# Altium PCB DE-160516.PcbDoc
Units mm, origin at the board's own origin, x right, y up, seen from the top; angles counter-clockwise.
Board outline 97 x 97 mm, 2 copper layers (Top Layer, Bottom Layer); 60 components, 64 nets, 225 pads, 26 vias.
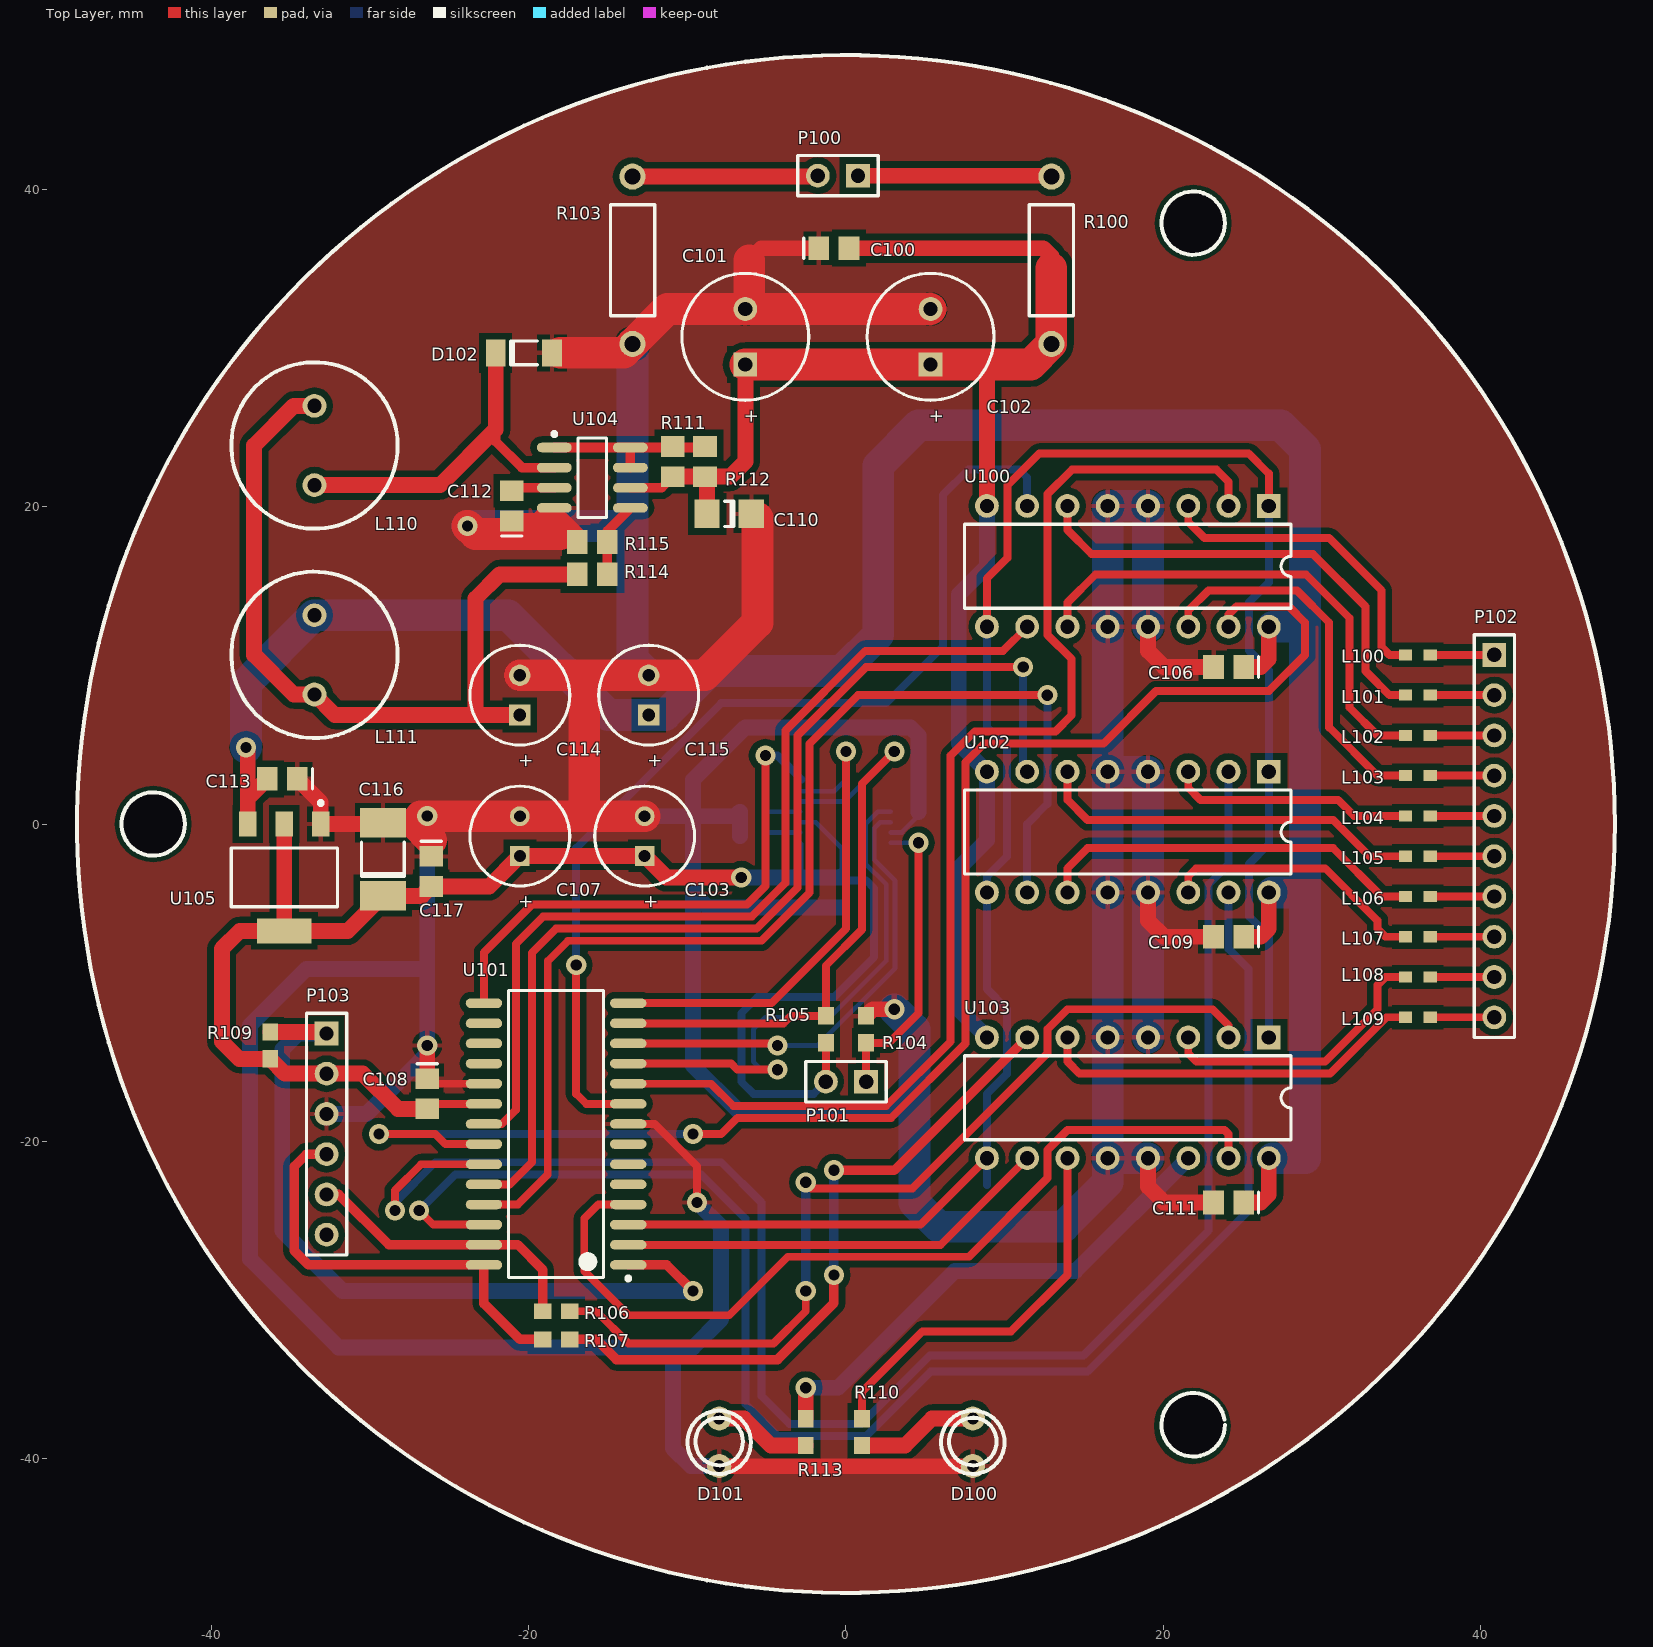
[diagram p0: Top Layer view]
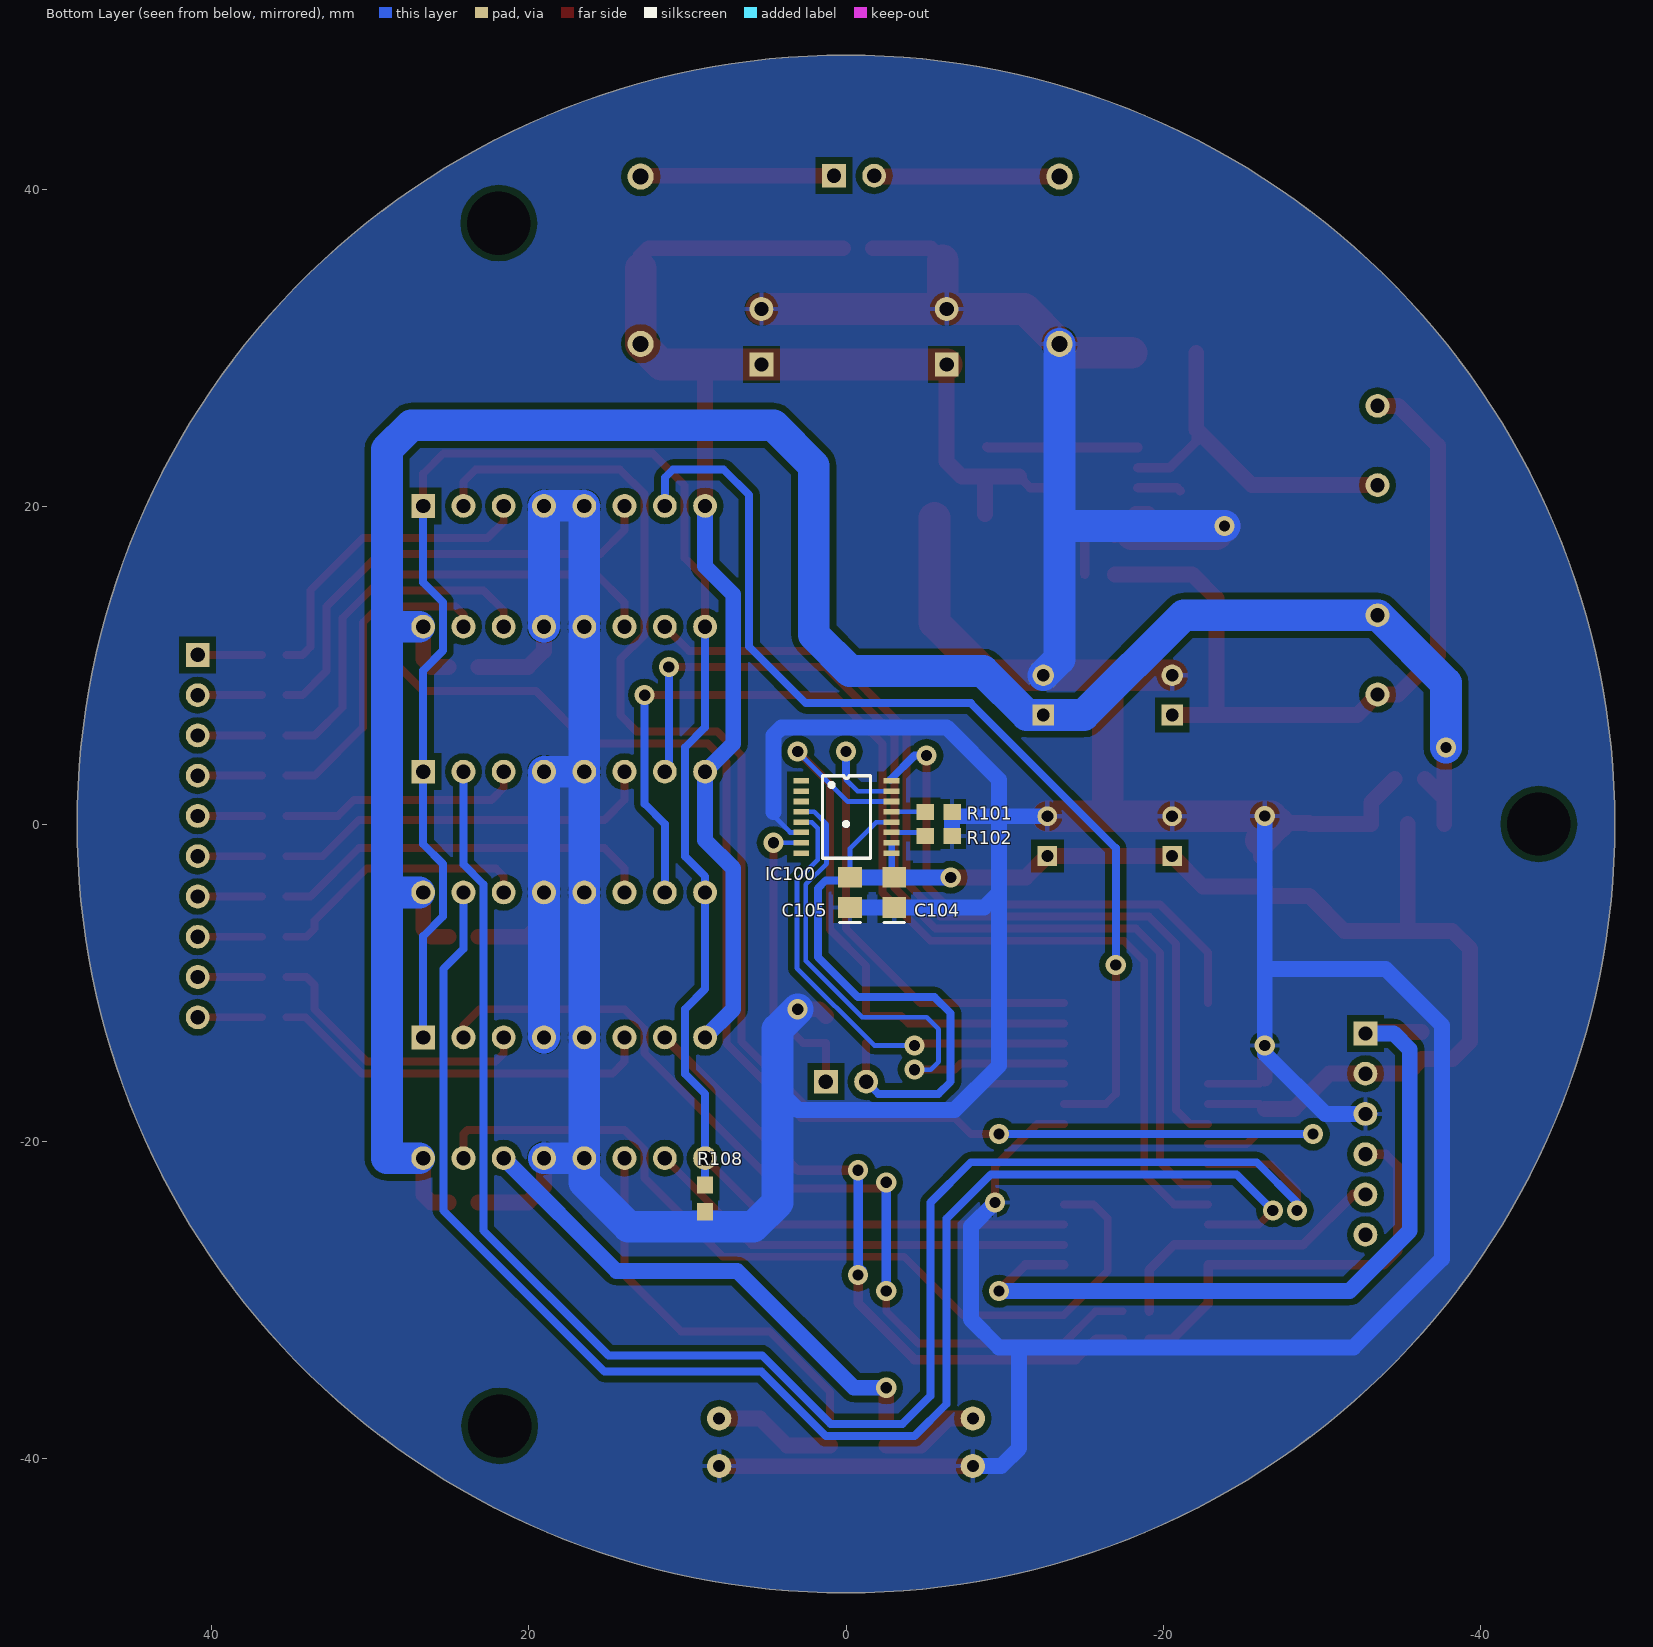
[diagram p1: Bottom Layer view, seen from below]

## Layer stack, top to bottom
Top Solder: solder mask 0.0102, Solder Resist, Dk 3.5
Top Layer: signal copper 0.0356
Dielectric 1: dielectric 0.32, FR-4, Dk 4.8
Bottom Layer: signal copper 0.0356
Bottom Solder: solder mask 0.0102, Solder Resist, Dk 3.5

## Board outline
-48.5,0 ccw(c0,0) 0,-48.5 ccw(c0,0) 48.5,0 ccw(c0,0) 0,48.5 ccw(c0,0)

## Design rules (kind name [scope] priority, off if disabled: settings)
Clearance [All] p1: gap=0.254 except(0.4: Arc-Poly Track-Poly SMDPad-Poly THPad-Poly Via-Poly Fill-Poly Poly-Poly)
PlaneClearance [All] p1: clearance=1
PlaneConnect [All] p1: planeconnectstyle=Relief reliefexpansion=0.508 reliefentries=4 reliefconductorwidth=0.4 reliefairgap=3
PolygonConnect [All] p1: connectstyle=Relief reliefconductorwidth=0.3 reliefentries=4 polygonreliefangle="90 Angle" airgapwidth=0.3
RoutingVias [All] p1: holewidth=0.711 width=1.27 viastyle="Through Hole" minholewidth=0.711 minwidth=1.27 maxholewidth=0.711 maxwidth=1.27
SolderMaskExpansion [All] p1: expansion=0.102
Width [All] p1: maxlimit=5 minlimit=0.254 preferedwidth=1
28 further rules are at their usual default settings.

## Components (designator, comment, footprint, x,y, rotation, side; value= is the part's Value field where it differs from the comment)
C100 "" 0805 -0.762,36.322 r0 top
C101 "220uF" E -6.35,30.734 r90 top
C102 "220uF" E 5.334,30.734 r90 top
C103 "10uF" C -12.7,-0.762 r90 top
C104 "" 0805 -3.048,-4.318 r90 bottom
C105 "" 0805 -0.254,-4.318 r90 bottom
C106 "" 0805 24.13,9.906 r180 top
C107 "10uF" C -20.574,-0.762 r90 top
C108 "" 0805 -26.416,-17.018 r270 top
C109 "" 0805 24.13,-7.112 r180 top
C110 "" 1206 -7.366,19.558 r180 top
C111 "" 0805 24.13,-23.876 r180 top
C112 "" 0805 -21.082,20.066 r90 top
C113 "" 0805 -35.56,2.849 r180 top
C114 "470uF" CAPPR2.5-6.3X11 -20.574,8.128 r90 top
C115 "470uF" CAPPR2.5-6.3X11 -12.446,8.128 r90 top
C116 "10uF" 49BC-C -29.21,-2.231 r90 top
C117 "" 0805 -26.162,-2.993 r270 top
D100 "STATUS" "LED 3mm" 8,-39 r90 top
D101 "ZERO POS" "LED 3mm" -8,-39 r90 top
D102 "BAV102" SOD80C -20.32,29.718 r180 top
IC100 "AEAT-6600" TSSOP16 2.819,2.718 r180 bottom
L100 "10uH" SMD-0603 36.068,10.668 r0 top
L101 "10uH" SMD-0603 36.068,8.128 r0 top
L102 "10uH" SMD-0603 36.068,5.588 r0 top
L103 "10uH" SMD-0603 36.068,3.048 r0 top
L104 "10uH" SMD-0603 36.068,0.508 r0 top
L105 "10uH" SMD-0603 36.068,-2.032 r0 top
L106 "10uH" SMD-0603 36.068,-4.572 r0 top
L107 "10uH" SMD-0603 36.068,-7.112 r0 top
L108 "10uH" SMD-0603 36.068,-9.652 r0 top
L109 "10uH" SMD-0603 36.068,-12.192 r0 top
L110 "" RB5-10.5 -33.528,23.876 r90 top
L111 "" RB5-10.5 -33.528,10.668 r90 top
P100 "PWR_IN" HDR1X2 0.762,40.894 r180 top
P101 "ALIGN" HDR1X2 1.27,-16.256 r180 top
P102 "Header 10" HDR1X10 40.894,10.668 r270 top
P103 "Header 6" HDR1X6 -32.766,-13.208 r270 top
R100 "1R" RD6.35x2.3 12.954,35.56 r90 top
R101 "10K" ERA-0603 -5.842,0.762 r0 bottom
R102 "10K" ERA-0603 -5.842,-0.762 r0 bottom
R103 "1R" RD6.35x2.3 -13.462,35.56 r90 top
R104 "10K" ERA-0603 1.27,-12.954 r270 top
R105 "10K" ERA-0603 -1.27,-12.954 r270 top
R106 "10K" ERA-0603 -18.288,-30.734 r180 top
R107 "10K" ERA-0603 -18.288,-32.512 r180 top
R108 "10K" ERA-0603 8.89,-23.622 r270 bottom
R109 "10K" ERA-0603 -36.322,-13.97 r270 top
R110 "2K2" ERA-0603 1.016,-38.354 r270 top
R111 "1R" ERA-0805 -10.922,22.86 r90 top
R112 "1R" ERA-0805 -8.89,22.86 r90 top
R113 "2K2" ERA-0603 -2.54,-38.354 r270 top
R114 "3K6" ERA-0805 -16.002,15.748 r180 top
R115 "1k2" ERA-0805 -16.002,17.78 r0 top
U100 "L293B" DIP16 17.78,16.256 r180 top
U101 "PIC18F23K20-I/SO" SOIC-SO28_N -18.288,-19.558 r180 top
U102 "L293B" DIP16 17.78,-0.508 r180 top
U103 "L293B" DIP16 17.78,-17.272 r180 top
U104 "MC34063AD" 751-05_N -16.002,21.844 r0 top
U105 "REG1117-3.3" ZZ311 -35.433,-3.374 r180 top

## Footprints (in the part's own frame and the unit in brackets; to place one, negate y for a bottom-side part, rotate by r counter-clockwise, add the part's x,y. Pads: shape width x height; smd on the part's side, far side on the other; paste and mask are expansions set on the pad)
49BC-C [mm] "Chip Capacitor; Body 5.08 x 2.54 mm (LxW typ)"
  rect 1.85x2.9 smd: 1(-2.3,0) 2(2.3,0)
  silkscreen extent -1.08,-1.35 1.07,1.35
751-05_N [mm] "SOIC, 8-Leads, Body 4.9x3.9mm, Pitch 1.27mm, IPC Medium Density"
  oval 2.2x0.6 smd: 1(-2.4,1.905) 2(-2.4,0.635) 3(-2.4,-0.635) 4(-2.4,-1.905) 5(2.4,-1.905) 6(2.4,-0.635) 7(2.4,0.635) 8(2.4,1.905)
  silkscreen extent -2.52,-2.5 0.9,2.88, body extent -1.95,-2.45 1.95,2.45, height 1.75
0805 [mm] "Chip Capacitor; Body 2.0 x 1.2 mm (LxW typ)"
  rect 1.3x1.5 smd: 1(-0.95,0) 2(0.95,0)
  silkscreen extent -1.9,-0.65 -1.9,0.65
1206 [mm] "Chip Capacitor; Body 3.2 x 1.6 mm (LxW typ)"
  rect 1.6x1.8 smd: 1(-1.4,0) 2(1.4,0)
  silkscreen extent -0.3,-0.8 0.3,0.8
C [mm] "Capacitor, Electrolytic, Radial; Body 6.3 x 6.8 mm (Dia.xH typ); Pin Spacing 2.5 mm (typ)"
  rect 1.25x1.25 hole 0.75: 1(-1.25,0)
  round 1.25 hole 0.75: 2(1.25,0)
  silkscreen extent -3.15,-3.15 3.15,3.15
CAPPR2.5-6.3X11 [mm] "Capacitor, Electrolytic, Radial; Body 6.3 x 11 mm (Dia.xH typ); Pin Spacing 2.5 mm (typ)"
  rect 1.35x1.35 hole 0.8: 1(-1.25,0)
  round 1.35 hole 0.8: 2(1.25,0)
  silkscreen extent -3.15,-3.15 3.15,3.15
DIP16 [mm] "DIP; 16 Leads; Row Spacing 7.62 mm; Pitch 2.54 mm"
  rect 1.5x1.5 hole 0.9: 1(-8.89,-3.81)
  round 1.5 hole 0.9: 2(-6.35,-3.81) 3(-3.81,-3.81) 4(-1.27,-3.81) 5(1.27,-3.81) 6(3.81,-3.81) 7(6.35,-3.81) 8(8.89,-3.81) 9(8.89,3.81) 10(6.35,3.81) 11(3.81,3.81) 12(1.27,3.81) 13(-1.27,3.81) 14(-3.81,3.81) 15(-6.35,3.81) 16(-8.89,3.81)
  silkscreen extent -10.3,-2.65 10.3,2.65
E [mm] "Capacitor, Electrolytic, Radial; Body 8 x 10.5 mm (Dia.xH typ); Pin Spacing 3.5 mm (typ)"
  rect 1.5x1.5 hole 0.9: 1(-1.75,0)
  round 1.5 hole 0.9: 2(1.75,0)
  silkscreen extent -4,-4 4,4
ERA-0603 [mm] "Chip Resistor; Body 1.6 x 0.8 mm (LxW typ)"
  rect 1.1x1 smd: 1(-0.85,0) 2(0.85,0)
ERA-0805 [mm] "Chip Resistor; Body 2 x 1.3 mm (LxW typ)"
  rect 1.3x1.5 smd: 1(-0.95,0) 2(0.95,0)
HDR1X2 [mm] "Connector; Header; 2 Position"
  rect 1.5x1.5 hole 0.9: 1(0,0)
  round 1.5 hole 0.9: 2(2.54,0)
  silkscreen extent -1.27,-1.27 3.81,1.27
HDR1X6 [mm] "Connector; Header; 6 Position"
  rect 1.5x1.5 hole 0.9: 1(0,0)
  round 1.5 hole 0.9: 2(2.54,0) 3(5.08,0) 4(7.62,0) 5(10.16,0) 6(12.7,0)
  silkscreen extent -1.27,-1.27 13.97,1.27
HDR1X10 [mm] "Connector; Header; 10 Position"
  rect 1.5x1.5 hole 0.9: 1(0,0)
  round 1.5 hole 0.9: 2(2.54,0) 3(5.08,0) 4(7.62,0) 5(10.16,0) 6(12.7,0) 7(15.24,0) 8(17.78,0) 9(20.32,0) 10(22.86,0)
  silkscreen extent -1.27,-1.27 24.13,1.27
"LED 3mm" [mil] "LED dioda 3 mm"
  round 60 hole 30: 1(-59.06,0) 2(59.06,0)
  silkscreen extent -79,-79 79,79
RB5-10.5 [mm] "Capacitor (Radial); 2 Leads"
  round 1.5 hole 0.9: 1(-2.5,0) 2(2.5,0)
  silkscreen extent -5.25,-5.25 5.25,5.25
RD6.35x2.3 [mm] "Resistor, Axial; Body 7 x 2.8 mm (LxDia. max), Lead Dia. 0.65 mm (max)"
  round 1.65 hole 1: 1(-5.275,0) 2(5.275,0)
  silkscreen extent -3.5,-1.4 3.5,1.4
SMD-0603 [mm] "Chip Inductor, 2-Leads, Body 1.6x0.8mm"
  rect 0.85x0.7 smd: 1(-0.775,0) 2(0.775,0)
  body extent -0.8,-0.4 0.8,0.4, height 0.79
SOD80C [mm] "Metal Electrode Face (MELF) Diode; Body 3.5 x 1.6 mm (LxDia)"
  rect 1.25x1.7 smd: 1(-1.775,0) 2(1.775,0)
  silkscreen extent -0.85,-0.75 0.85,0.75
SOIC-SO28_N [mm] "SOIC, 28-Leads, Body 17.9x7.5mm, Pitch 1.27mm, IPC Medium Density"
  oval 2.3x0.6 smd: 1(-4.55,8.255) 2(-4.55,6.985) 3(-4.55,5.715) 4(-4.55,4.445) 5(-4.55,3.175) 6(-4.55,1.905) 7(-4.55,0.635) 8(-4.55,-0.635) 9(-4.55,-1.905) 10(-4.55,-3.175) 11(-4.55,-4.445) 12(-4.55,-5.715) 13(-4.55,-6.985) 14(-4.55,-8.255) 15(4.55,-8.255) 16(4.55,-6.985) 17(4.55,-5.715) 18(4.55,-4.445) 19(4.55,-3.175) 20(4.55,-1.905) 21(4.55,-0.635) 22(4.55,0.635) 23(4.55,1.905) 24(4.55,3.175) 25(4.55,4.445) 26(4.55,5.715) 27(4.55,6.985) 28(4.55,8.255)
  silkscreen extent -4.67,-9.05 3,9.23, body extent -3.8,-9.06 3.8,9.06, height 2.65
TSSOP16 [mm]
  rect 1x0.35 smd: 1(0,0) 2(0,-0.65) 3(0,-1.3) 4(0,-1.95) 5(0,-2.6) 6(0,-3.25) 7(0,-3.9) 8(0,-4.55) 9(5.7,-4.55) 10(5.7,-3.9) 11(5.7,-3.25) 12(5.7,-2.6) 13(5.7,-1.95) 14(5.7,-1.3) 15(5.7,-0.65) 16(5.7,0)
  silkscreen extent 1.33,-4.88 4.37,0.33, body extent 0.63,-4.83 5.08,0.25, height 1.2
ZZ311 [mm] "SOT-223/SC-73; 4 Leads; Body 6.7 x 7.3 mm, inc. leads (LxW max)"
  rect 1.1x1.55 smd: 1(-2.3,-3.375) 2(0,-3.375) 3(2.3,-3.375)
  rect 3.45x1.55 smd: 4(0,3.375)
  silkscreen extent -3.35,-4.82 3.35,1.85

## Part data
C100 C104 C105 C106 C108 C109 C111 C112 C113 C117: library part C0805, "Ceramic Chip Capacitor - Standard"
C101 C102: library part 94SS107X0020EBP, "Solid Aluminum Capacitor with Organic Semiconductor Electrolyte: 100uF, 20V, Bulk Pack"
C103 C107: library part 94SC106X0016CBP, "Solid Aluminum Capacitor with Organic Semiconductor Electrolyte: 10uF, 16V, Bulk Pack"
C110: library part C1206, "Ceramic Chip Capacitor - Standard"
C114 C115: library part EKA00BA347C00, "Aluminum Electrolytic Capacitor, Radial Style with Long Leads: 470uF, 10V"
C116: library part 49BC685B010M, "Conformal Coated Solid Tantalum Chip Capacitor: 6.8uF, 20% Tolerance, 10 WVDC @ -55°C to +85°C, Surge = 13V"
D100 D101: library part "LED 3mm yellow", "LED dioda 3 mm"
D102: "General-purpose Diode"
IC100: "Absolute encoder IC"
L100 L101 L102 L103 L104 L105 L106 L107 L108 L109: library part 7447962, "SMD-Multilayer Inductor WE-MI, L = 0.10µH"
L110 L111: library part PCMC063T-R82MN, "SMT Power Choke Coil; Size 7.3×6.6×3.0mm, ±20% Tolerance, 0.82uH, 13A"
P100 P101: library part "Header 2", "Header, 2-Pin"
P102: "Header, 10-Pin"
P103: "Header, 6-Pin"
R100 R103: library part ERD2FC, "Flame-Retardant Fuse Type Carbon Film Resistor, 4.7 Ohm to 3.3k Ohm Range, 2% and 5% Tolerance, 0.25 W"
R101 R102 R104 R105 R106 R107 R108 R109 R110 R113: library part ERAV, "Metal Film Thermosensitive Chip Resistor, 0.56 Ohm to 10k Ohm Range, 5% Tolerance, 0603 Size, 0.063 W"
R111 R112 R114 R115: library part ERAS, "Metal Film Thermosensitive Chip Resistor, 0.56 Ohm to 10k Ohm Range, 5% Tolerance, 0805 Size, 0.1 W"
U100 U102 U103: "Push-Pull Four Channel Drivers"
U101: "Flash Microcontroller with nanoWatt XLP Technology, 28-pin SOIC, Industrial Temperature"
U104: "DC-to-DC Converter Control Circuit"
U105: "800mA and 1A Low Dropout Positive Regulator 2.85V, 3.3V, 5V, and Adjustable"

## Free pads (board coordinates)
  round 0.524 hole 4: RUPA(-43.7,0) RUPA(21.844,-37.973) RUPA(21.9,37.9)

## Via types
v1: diameter 1.27, hole 0.711, Top Layer to Bottom Layer, 26 vias

## Nets (pads, with @x,y where several pads share a name; then routed paths per layer and width w, separated by ;. In a path a pad name is that pad's centre, name@x,y a point inside that pad or via, vN(x,y) a via of type N, cw(c..) or ccw(c..) an arc to the next point about the centre after c; other vN are vias at no path point)
+3V3: C103.1 C104.2 C105.2 C107.1 C108.2 C116.1 C117.2 IC100.9 IC100.10 IC100.12 P101.2 P103.2 R105.2 R109.2 U101.20 U105.2 U105.4 | length 109.7
  Top Layer w0.5: C108.2 -26.101,-17.653 U101.20 ; P101.2 R105.2
  Top Layer w1: U105.2 U105.4 ; C108.2 -28.26,-17.968 -30.48,-15.748 P103.2 -35.394,-15.748 R109.2 -38.266,-14.82 -39.37,-13.716 -39.37,-7.874 -38.245,-6.749 U105.4 ; v1(-6.604,-3.368) -11.344,-3.368 C103.1 C107.1 -22.505,-3.943 C117.2 -26.75,-4.531 C116.1 -31.428,-6.749 U105.4
  Bottom Layer w0.3: IC100.12 -1.896,0.118 -0.254,-1.524 C105.2
  Bottom Layer w0.4: C104.2@-2.881,-3.201 IC100.9 IC100.10@-2.881,-1.27
  Bottom Layer w0.5: P101.2 -2.032,-17.018 -5.842,-17.018 -6.604,-16.256 -6.604,-11.938 -5.588,-10.922 -0.762,-10.922 1.778,-8.382 1.778,-4.064 1.27,-3.556 -0.066,-3.556 C105.2 C105.2@-0.32,-3.302
  Bottom Layer w1: v1(-6.604,-3.368) C104.2@-3.18,-3.368 ; C105.2@-0.32,-3.302 -0.386,-3.368 C104.2 ; C104.2@-3.18,-3.368 -3.114,-3.302 C104.2 ; C104.2@-3.18,-3.368 C104.2
+5V: C106.1 C109.1 C111.1 C113.2 C115.1 L111.2 U100.16 U102.16 U103.16 U105.3 | length 159.1
  Top Layer w1: v1(-37.846,4.826) -37.733,4.713 -37.733,1.626 ; U105.3 -37.733,1.626 ; C113.2 -37.733,1.626 ; C111.1 26.162,-23.876 26.67,-23.368 U103.16 ; C109.1 26.162,-7.112 26.67,-6.604 U102.16 ; C106.1 26.162,9.906 26.67,10.414 U100.16
  Bottom Layer w2: v1(-37.846,4.826) -37.846,8.89 -33.568,13.168 L111.2 -21.296,13.168 -15.006,6.878 C115.1 -11.41,6.878 -8.636,9.652 -0.254,9.652 2.032,11.938 2.032,22.606 4.572,25.146 27.432,25.146 28.956,23.622 28.956,12.446 ; U103.16@26.924,-21.082 28.956,-21.082 28.956,-4.318 ; U102.16@26.924,-4.318 28.956,-4.318 ; U100.16@26.924,12.446 28.956,12.446 ; 28.956,-4.318 28.956,12.446
+24V: C100.2 C101.1 C102.1 C110.2 R100.1 R111.1 R112.1 U100.8 U102.8 U103.8 U104.6 | length 100.2
  Top Layer w0.6: U104.6 -11.623,21.209 R111.1
  Top Layer w1: R111.1 R112.1 ; C110.2 -8.766,21.786 R112.1 ; C101.1 -6.35,22.86 -7.3,21.91 R112.1 ; C100.2 12.446,36.322 12.954,35.814 12.954,35.052 ; U100.8 8.89,28.984
  Top Layer w2: C101.1 C102.1 8.89,28.984 11.653,28.984 R100.1 12.954,35.052
  Bottom Layer w1: U103.8 7.112,-11.684 7.112,-2.794 8.89,-1.016 U102.8 7.112,5.08 7.112,14.478 8.89,16.256 U100.8
A: IC100.1
B: IC100.2
DRIVER_OE: R108.1 U100.1 U100.9 U101.3 U102.1 U102.9 U103.1 U103.9 | length 126.6
  Top Layer w0.5: U101.3 4.699,-25.273 U103.9 ; U100.9 8.89,15.494 10.176,16.78 10.176,21.352 12.192,23.368 25.4,23.368 26.67,22.098 U100.1
  Bottom Layer w0.5: R108.1 U103.9 8.89,-17.018 10.144,-15.764 10.144,-11.668 8.89,-10.414 U102.9 8.89,-3.302 10.144,-2.048 10.144,4.842 8.89,6.096 U100.9 ; U103.1 26.67,-7.076 25.416,-5.822 25.416,-2.524 26.67,-1.27 U102.1 26.67,9.688 25.416,10.942 25.416,13.986 26.67,15.24 U100.1
ENC_1: U100.2 U101.10 | length 77.8
  Top Layer w0.5: U101.10 -8.509,-16.383 -7.112,-17.78 2.54,-17.78 6.604,-13.716 6.604,4.318 8.128,5.842 13.208,5.842 14.224,6.858 14.224,10.419 12.716,11.927 12.716,20.812 14.256,22.352 23.368,22.352 24.13,21.59 U100.2
ENC_2: U100.7 U101.9 | length 65
  Top Layer w0.5: v1(-17.018,-8.89) -17.018,-17.018 -16.383,-17.653 U101.9
  Bottom Layer w0.5: v1(-17.018,-8.89) -17.018,-1.524 -7.874,7.62 2.54,7.62 6.108,11.188 6.108,20.745 7.715,22.352 10.922,22.352 11.43,21.844 U100.7
ENC_4: U100.10 U101.21 | length 59
  Top Layer w0.5: U101.21 -21.717,-18.923 -20.828,-18.034 -20.828,-7.57 -19.1,-5.842 -5.943,-5.842 -3.81,-3.709 -3.81,5.892 1.22,10.922 9.906,10.922 U100.10
ENC_8: U100.15 U101.22 | length 97
  Top Layer w0.5: v1(-29.464,-19.558) -25.908,-19.558 -25.273,-20.193 U101.22 ; v1(-9.652,-19.558) -7.874,-19.558 -6.85,-18.534 2.852,-18.534 7.535,-13.851 7.535,3.895 8.721,5.08 16.256,5.08 19.558,8.382 26.67,8.382 28.956,10.668 28.956,12.7 27.94,13.716 24.638,13.716 24.13,13.208 U100.15
  Bottom Layer w0.5: v1@-29.718,-19.304 v1(-29.464,-19.558) -29.21,-19.812 -28.956,-19.558 v1(-9.652,-19.558)
ENC_10: U101.23 U102.2 | length 108.9
  Top Layer w0.5: v1(-28.448,-24.384) -28.448,-23.114 -26.797,-21.463 U101.23
  Bottom Layer w0.5: v1(-28.448,-24.384) -28.448,-23.876 -25.908,-21.336 -7.874,-21.336 -5.334,-23.876 -5.334,-36.068 -3.556,-37.846 0.966,-37.846 5.284,-33.528 14.986,-33.528 22.876,-25.638 22.876,-3.799 24.13,-2.545 U102.2
ENC_20: U101.24 U102.7 | length 67.6
  Top Layer w0.5: U101.24 -21.209,-22.733 -19.812,-21.336 -19.812,-8.128 -18.288,-6.604 -5.638,-6.604 -3.056,-4.022 -3.056,5.58 1.27,9.906 v1(11.176,9.906)
  Bottom Layer w0.5: v1(11.176,9.906) 11.176,3.556 U102.7
ENC_40: U101.25 U102.10 | length 75.2
  Top Layer w0.5: U101.25 -20.701,-24.003 -18.812,-22.114 -18.812,-8.652 -17.526,-7.366 -5.334,-7.366 -2.302,-4.334 -2.302,5.064 0.762,8.128 v1(12.7,8.128)
  Bottom Layer w0.5: U102.10 11.43,0 12.7,1.27 v1(12.7,8.128)
ENC_80: U101.26 U102.15 | length 98.3
  Top Layer w0.5: v1(-26.924,-24.384) -26.035,-25.273 U101.26
  Bottom Layer w0.5: v1@-27.178,-24.13 v1(-26.924,-24.384) -24.638,-22.098 -9.144,-22.098 -6.35,-24.892 -6.35,-36.576 -4.318,-38.608 1.27,-38.608 5.334,-34.544 15.24,-34.544 25.4,-24.384 25.4,-9.144 24.13,-7.874 U102.15
ENC_100: R106.1 U103.2 | length 58.5
  Top Layer w0.5: R106.1 -15.748,-30.734 -13.716,-32.766 -4.572,-32.766 -2.54,-30.734 v1(-2.54,-29.464) v1@-2.54,-29.21 ; v1(-2.54,-22.606) -2.163,-22.983 4.195,-22.983 12.716,-14.462 12.716,-12.943 13.975,-11.684 23.114,-11.684 24.13,-12.7 U103.2
  Bottom Layer w0.6: v1(-2.54,-29.464) v1(-2.54,-22.606)
ENC_200: R107.1 U103.7 | length 42.9
  Top Layer w0.6: R107.1 -15.748,-32.512 -14.478,-33.782 -4.318,-33.782 -0.762,-30.226 v1(-0.762,-28.448) ; v1(-0.762,-21.844) 3.048,-21.844 U103.7
  Bottom Layer w0.6: v1(-0.762,-28.448) -1.016,-28.194 -0.762,-27.94 v1(-0.762,-21.844)
ENC_OUT_1: L100.1 U100.3 | length 20.3
  Top Layer w0.5: U100.3 21.59,19.05 22.606,18.034 30.48,18.034 33.774,14.74 33.774,11.176 34.282,10.668 L100.1
ENC_OUT_2: L101.1 U100.6 | length 29.5
  Top Layer w0.5: U100.6 13.97,18.542 15.494,17.018 29.464,17.018 32.766,13.716 32.766,9.652 34.29,8.128 L101.1
ENC_OUT_4: L102.1 U100.11 | length 31.1
  Top Layer w0.5: U100.11 13.97,13.97 15.748,15.748 29.006,15.748 31.75,13.004 31.75,7.358 33.52,5.588 L102.1
ENC_OUT_8: L103.1 U100.14 | length 24
  Top Layer w0.5: U100.14 21.59,13.462 22.86,14.732 28.448,14.732 30.48,12.7 30.48,6.096 33.528,3.048 L103.1
ENC_OUT_10: L104.1 U102.3 | length 15.5
  Top Layer w0.5: U102.3 21.59,2.286 22.36,1.516 31.046,1.516 32.054,0.508 L104.1
ENC_OUT_20: L105.1 U102.6 | length 24.6
  Top Layer w0.5: U102.6 13.97,1.524 15.24,0.254 30.734,0.254 33.02,-2.032 L105.1
ENC_OUT_40: L106.1 U102.11 | length 24.6
  Top Layer w0.5: U102.11 13.97,-2.794 15.24,-1.524 30.734,-1.524 33.782,-4.572 L106.1
ENC_OUT_80: L107.1 U102.14 | length 17
  Top Layer w0.5: U102.14 21.59,-3.294 22.09,-2.794 30.226,-2.794 33.528,-6.096 33.528,-6.604 34.036,-7.112 L107.1
ENC_OUT_100: L108.1 U103.3 | length 18
  Top Layer w0.5: U103.3 21.59,-14.478 22.098,-14.986 30.226,-14.986 33.528,-11.684 33.528,-10.16 34.036,-9.652 L108.1
ENC_OUT_200: L109.1 U103.6 | length 24.6
  Top Layer w0.5: U103.6 13.97,-14.986 14.732,-15.748 30.53,-15.748 34.086,-12.192 L109.1
ICSP_PGC: P103.5 R106.2 U101.27 | length 18.2
  Top Layer w0.6: P103.5 -32.004,-23.368 -28.829,-26.543 U101.27 -20.701,-26.543 -19.138,-28.106 R106.2
ICSP_PGD: P103.4 R107.2 U101.28 | length 27.1
  Top Layer w0.6: P103.4 -34.036,-20.828 -34.798,-21.59 -34.798,-26.924 -33.909,-27.813 U101.28 -22.838,-30.248 -20.574,-32.512 R107.2
ICSP_VPP: P103.1 R109.1 U101.1 | length 50.5
  Top Layer w0.6: U101.1 -11.303,-27.813 v1(-9.652,-29.464)
  Top Layer w1: R109.1 -32.854,-13.12 P103.1
  Bottom Layer w1: P103.1 -34.544,-13.208 -35.56,-14.224 -35.56,-25.654 -31.75,-29.464 v1(-9.652,-29.464)
MAG_HI: IC100.4 U101.11 | length 34.6
  Top Layer w0.5: U101.11 -7.239,-15.113 -6.858,-15.494 v1(-4.318,-15.494)
  Bottom Layer w0.3: v1(-4.318,-15.494) -5.334,-15.494 -5.842,-14.986 -5.842,-12.954 -5.08,-12.192 -1.016,-12.192 2.54,-8.636 2.54,-3.81 1.224,-2.494 1.224,-0.025 2.016,0.768 IC100.4
MAG_LO: IC100.5 U101.12 | length 29.5
  Top Layer w0.5: U101.12 -4.445,-13.843 v1(-4.318,-13.97)
  Bottom Layer w0.3: v1(-4.318,-13.97) -1.778,-13.97 3.094,-9.098 3.094,-3.581 1.778,-2.265 1.778,-0.254 2.15,0.118 IC100.5
NetC112_2: C112.2 U104.3 | length 2.8
  Top Layer w0.6: C112.2 -20.889,21.209 U104.3
NetC114_1: C114.1 L110.2 L111.1 R114.2 | length 50.8
  Top Layer w1: L110.2 -34.838,26.376 -37.338,23.876 -37.338,10.668 -34.838,8.168 L111.1 -32.238,6.878 -23.368,6.878 ; C114.1 -23.368,6.878 ; R114.2 -21.844,15.748 -23.368,14.224 -23.368,6.878
NetD100_2: D100.2 R110.2 | length 7.7
  Top Layer w1: R110.2 3.722,-39.204 5.426,-37.5 D100.2
NetD101_2: D101.2 R113.2 | length 6.2
  Top Layer w1: D101.2 -6.442,-37.5 -4.738,-39.204 R113.2
NetD102_2: D102.2 L110.1 U104.2 | length 22.9
  Top Layer w0.6: -22.095,24.892 -22.095,24.127 -20.447,22.479 U104.2
  Top Layer w1: L110.1 -25.611,21.376 -22.095,24.892 D102.2
NetIC100_7: IC100.7 P101.1 R104.2 | length 19
  Top Layer w0.5: P101.1 R104.2 2.706,-13.804 4.572,-11.938 v1(4.572,-1.182)
  Bottom Layer w0.3: IC100.7 v1(4.572,-1.182)
NetIC100_11: IC100.11 R102.2 | length 1.9
  Bottom Layer w0.3: R102.2@-4.762,-0.532 IC100.11
NetIC100_13: IC100.13 R101.2 | length 2.1
  Bottom Layer w0.3: R101.2@-4.986,0.768 IC100.13
NetL100_2: L100.2 P102.1 | length 4.1
  Top Layer w0.5: L100.2 P102.1
NetL101_2: L101.2 P102.2 | length 4.1
  Top Layer w0.5: L101.2 P102.2
NetL102_2: L102.2 P102.3 | length 4.1
  Top Layer w0.5: L102.2 P102.3
NetL103_2: L103.2 P102.4 | length 4.1
  Top Layer w0.5: L103.2 P102.4
NetL104_2: L104.2 P102.5 | length 4.1
  Top Layer w0.5: L104.2 P102.5
NetL105_2: L105.2 P102.6 | length 4.1
  Top Layer w0.5: L105.2 P102.6
NetL106_2: L106.2 P102.7 | length 4.1
  Top Layer w0.5: L106.2 P102.7
NetL107_2: L107.2 P102.8 | length 4.1
  Top Layer w0.5: L107.2 P102.8
NetL108_2: L108.2 P102.9 | length 4.1
  Top Layer w0.5: L108.2 P102.9
NetL109_2: L109.2 P102.10 | length 4.1
  Top Layer w0.5: L109.2 P102.10
NetP100_1: P100.1 R100.2 | length 12.2
  Top Layer w1: P100.1 12.895,40.894 R100.2
NetP100_2: P100.2 R103.2 | length 11.6
  Top Layer w1: R103.2 P100.2@-1.837,40.835
NetR110_1: R110.1 U103.11 | length 25.1
  Top Layer w0.5: R110.1 1.016,-35.814 4.826,-32.004 10.414,-32.004 13.97,-28.448 U103.11
NetR111_2: R111.2 R112.2 U104.1 U104.7 U104.8 | length 10.8
  Top Layer w0.6: U104.1 U104.8 ; U104.7 U104.8 ; R112.2 -8.951,23.749 U104.8
NetR113_1: R113.1 U103.14 | length 32.1
  Top Layer w1: R113.1 v1(-2.54,-35.56)
  Bottom Layer w1: v1(-2.54,-35.56) -0.508,-35.56 6.858,-28.194 14.478,-28.194 U103.14
NetR114_1: R114.1 R115.2 U104.5 | length 4.8
  Top Layer w0.6: R114.1 R115.2 -15.052,18.489 U104.5
RS422_RX: U101.18
RS422_TX: U101.17
SSI_CLK: IC100.15 U101.14 | length 31.8
  Top Layer w0.5: U101.14 -4.699,-11.303 0,-6.604 v1(0,4.572)
  Bottom Layer w0.3: IC100.15 -0.726,2.068 0,2.794 0,3.048
  Bottom Layer w0.5: 0,3.048 v1(0,4.572)
SSI_DATA: IC100.16 U101.15 | length 33.8
  Top Layer w0.5: U101.15 -22.838,-8.106 -19.812,-5.08 -6.247,-5.08 -5.08,-3.913 v1(-5.08,4.318)
  Bottom Layer w0.5: v1(-5.08,4.318) -4.318,4.318 IC100.16@-2.794,2.794
SSI_NCS: IC100.14 R105.1 U101.13 | length 38.4
  Top Layer w0.5: U101.13 -3.937,-12.573 -3.468,-12.104 R105.1 -1.27,-8.94 1.016,-6.654 1.016,2.54 v1(3.048,4.572)
  Bottom Layer w0.3: IC100.14 -0.106,1.418 v1(3.048,4.572)
STATUS: U101.4 U103.15 | length 55.7
  Top Layer w0.5: U101.4 -15.621,-24.003 -16.51,-24.892 -16.51,-28.194 -13.716,-30.988 -7.366,-30.988 -3.675,-27.297 7.755,-27.297 12.716,-22.336 12.716,-20.563 13.975,-19.304 23.876,-19.304 24.13,-19.558 U103.15
VSS: C100.1 C101.2 C102.2 C103.2 C104.1 C105.1 C106.2 C107.2 C108.1 C109.2 C110.1 C111.2 C112.1 C113.1 C114.2 C115.2 C116.2 C117.1 D100.1 D101.1 D102.1 IC100.6 P103.3 R101.1 R102.1 R103.1 R104.1 R108.2 R115.1 U100.4 U100.5 U100.12 U100.13 U101.8 U101.19 U102.4 U102.5 U102.12 U102.13 U103.4 U103.5 U103.12 U103.13 U104.4 U105.1 | length 460.6
  Top Layer w0.5: C108.1 -26.101,-16.383 U101.19 ; U101.8 -12.065,-18.923 -9.398,-21.59 v1(-9.398,-23.876) v1@-9.398,-24.13
  Top Layer w1: C113.1 -33.133,1.372 U105.1 -29.278,0.001 C116.2 -27.247,0.069 v1@-26.828,0.488 ; C108.1 v1(-26.416,-13.97) ; C117.1 -26.162,-1.016 ; C112.1 -19.492,19.116 -19.05,19.558 -18.288,19.558 R115.1@-16.952,18.222 ; D101.1 -8,-40.508 7.992,-40.508 D100.1 ; C101.2 C101.2@-6.096,32.738 ; -6.096,35.56 -5.334,36.322 C100.1 ; R104.1 1.69,-11.684 v1(3.048,-11.684) ; U103.13 19.05,-22.86 20.066,-23.876 C111.2 ; U102.13 19.05,-6.096 20.066,-7.112 C109.2 ; U100.13 19.05,10.922 20.066,9.906 C106.2
  Top Layer w2: -27.247,0.069 -26.162,-1.016 ; v1@-26.828,0.488 C107.2 -16.51,0.488 ; v1(-23.876,18.796) -23.368,18.288 -18.034,18.288 ; C114.2 -16.51,9.378 ; D102.1@-18.034,29.718 -14.029,29.718 R103.1 -11.263,32.484 C101.2 C102.2 ; C103.2 -16.51,0.488 ; C101.2@-6.096,32.738 -6.096,35.56 ; C110.1@-5.588,19.304 -5.588,12.7 -8.91,9.378 C115.2 -16.51,9.378 ; -16.51,0.488 -16.51,9.378
  Bottom Layer w0.3: IC100.6 3.532,-0.532 4.572,0.508 4.572,0.762
  Bottom Layer w1: P103.3 -30.226,-18.288 -26.416,-14.478 v1(-26.416,-13.97) -26.416,-9.144 ; v1(-26.416,0.508) -26.416,-9.144 ; C103.2 -9.652,0.488 ; v1(-9.398,-23.876) -7.874,-25.4 -7.874,-31.242 -9.652,-33.02 -10.922,-33.02 ; D101.1 -9.792,-40.5 -10.922,-39.37 -10.922,-33.02 ; R102.1 R101.1 -6.966,0.488 -9.652,0.488 ; C105.1 C104.1 -8.702,-5.268 -9.652,-4.318 ; 4.318,-16.764 3.048,-18.034 -6.858,-18.034 -9.652,-15.24 -9.652,-4.318 ; 4.572,0.762 4.572,5.588 4.064,6.096 -6.35,6.096 -9.652,2.794 -9.652,0.488 ; -26.416,-9.144 -34.036,-9.144 -37.592,-12.7 -37.592,-27.432 -32.004,-33.02 -10.922,-33.02 ; -9.652,-4.318 -9.652,0.488
  Bottom Layer w2: v1(-23.876,18.796) -13.97,18.796 -13.462,18.288 ; R103.1 -13.462,18.288 ; C115.2 -13.462,10.394 -13.462,18.288 ; v1(3.048,-11.684) 4.318,-12.954 4.318,-16.764 4.318,-23.876 5.842,-25.4 13.716,-25.4 16.51,-22.606 U103.12 ; U103.13 U103.12 ; U103.4 U102.13 U102.4 U102.5 ; U100.13 U100.4 U100.5 U100.12 U102.5 ; U103.12 U103.5 U102.12 U102.5
Z: IC100.3
ZERO: U101.2 U103.10 | length 27.4
  Top Layer w0.5: U101.2 5.969,-26.543 U103.10
pads on no net: IC100.8 P103.6 U101.5 U101.6 U101.7 U101.16

## Polygon pours and split planes (outlines as drawn)
VSS on Top Layer "Top Layer-No Net" (solid, remove dead copper, pour order 0): -48.5,0 ccw(c0,0) 0,-48.5 ccw(c0,0) 48.5,0 ccw(c0,0) 0,48.5 ccw(c0,0)
VSS on Bottom Layer "Top Layer-VSS" (solid, remove dead copper, pour order 1): -48.5,0 ccw(c0,0) 0,-48.5 ccw(c0,0) 48.5,0 ccw(c0,0) 0,48.5 ccw(c0,0)

## Silkscreen, mask and mechanical layers (free items; w line width, h text height)
Top Overlay:
  circle w0.254: c-43.7,0 r2
  circle w0.254: c21.9,37.9 r2
  circle w0.254: c0,0 r48.5
  lines w0.254: 23.873,-37.571 ccw(c21.9,-37.9) 23.9,-37.9

## Text inside footprints (layer, text, board x,y; h text height)
C101: Top Overlay "+" at -5.6,25.259 h0.8 r90
C102: Top Overlay "+" at 6.084,25.259 h0.8 r90
C103: Top Overlay "+" at -11.95,-5.387 h0.8 r90
C107: Top Overlay "+" at -19.824,-5.387 h0.8 r90
C114: Top Overlay "+" at -19.824,3.503 h0.8 r90
C115: Top Overlay "+" at -11.696,3.503 h0.8 r90